# Altium PCB TIA_For_Photodiode.PcbDoc
Units mm, origin at the board's own origin, x right, y up, seen from the top; angles counter-clockwise.
Board outline 40 x 22 mm, 4 copper layers (Top Layer, GND, Power, Bottom Layer), stack 1.5 mm thick; 60 components, 21 nets, 164 pads, 96 vias.
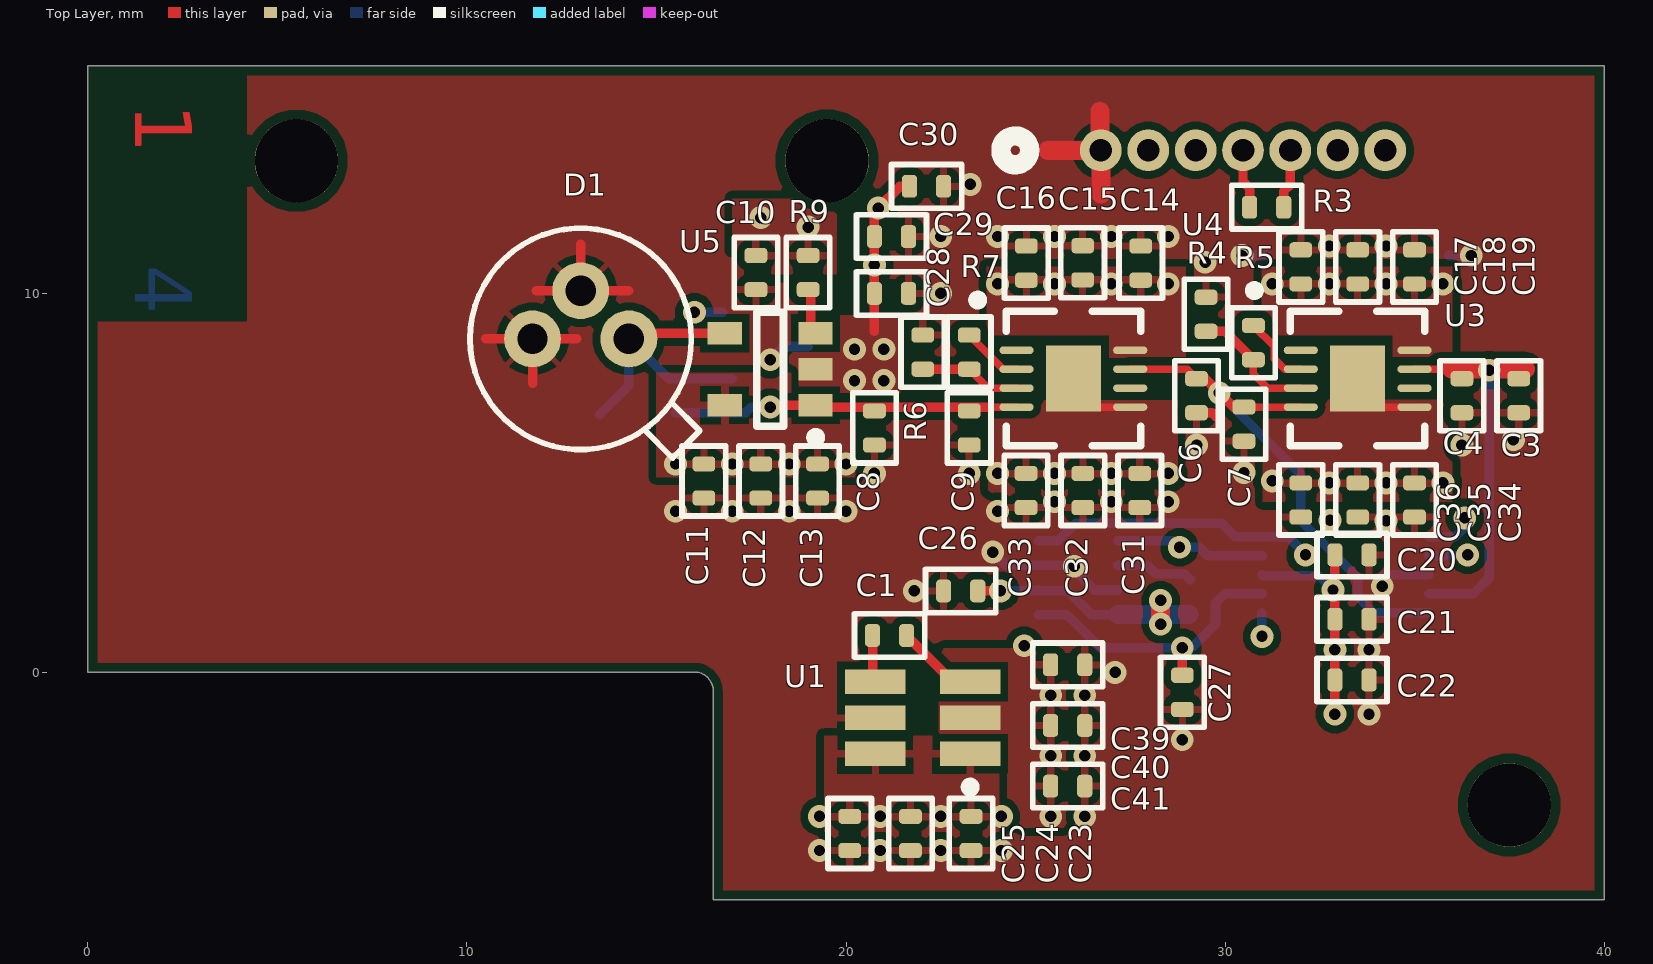
[diagram p0: Top Layer view]
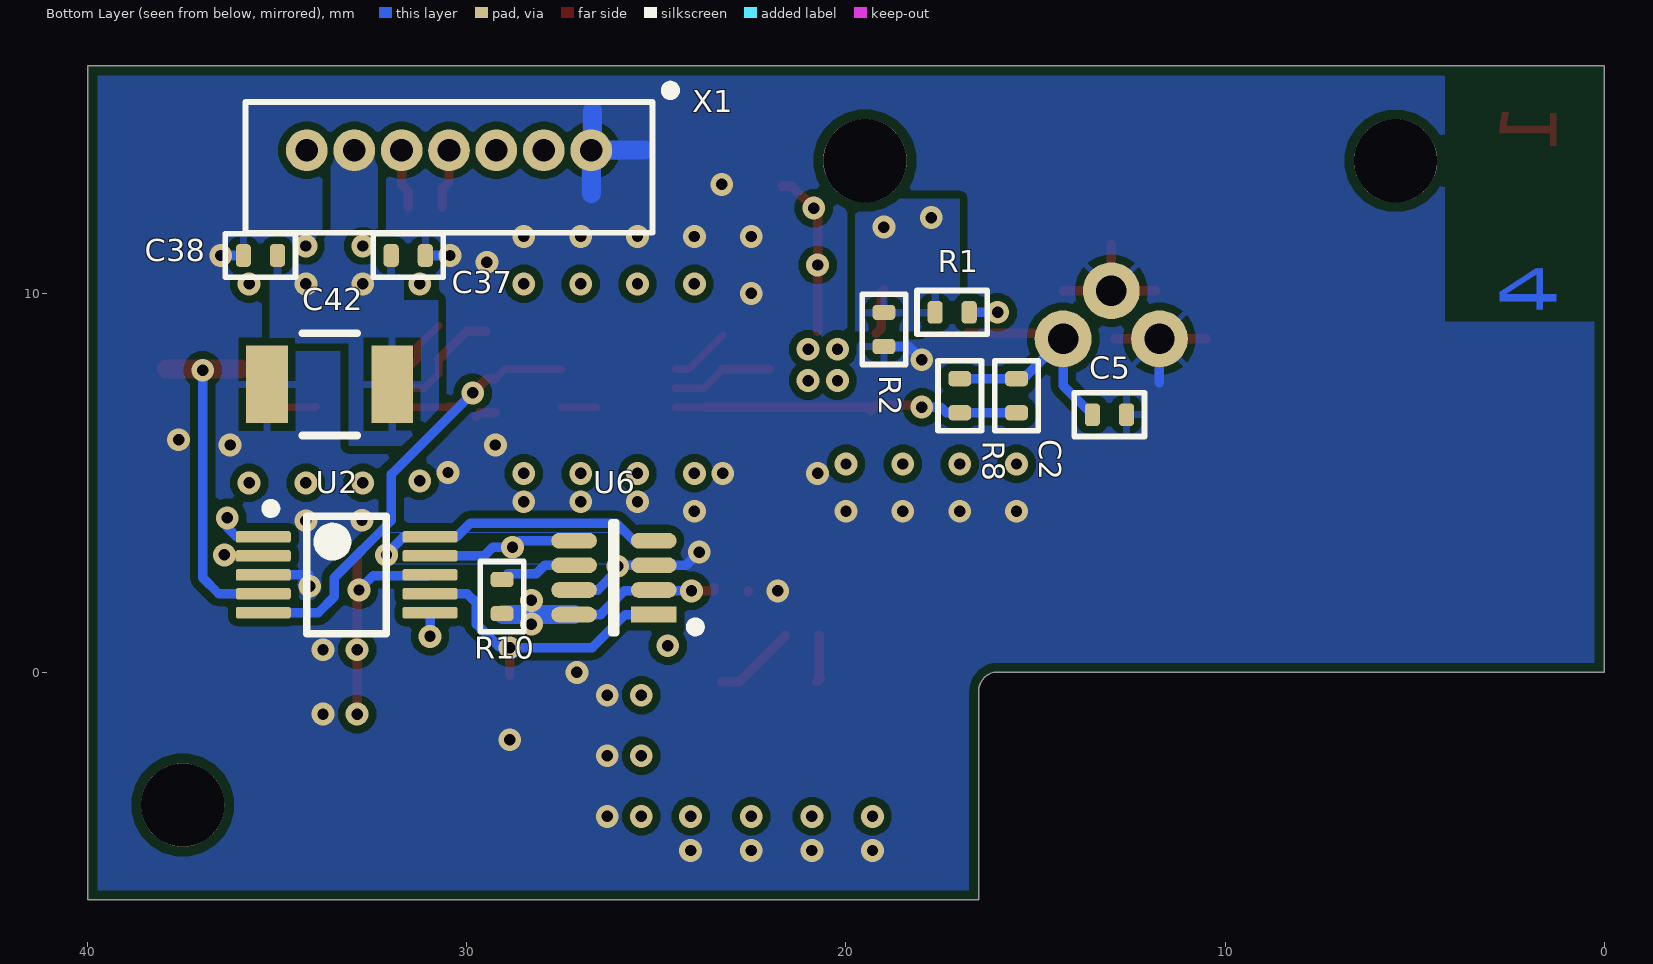
[diagram p1: Bottom Layer view, seen from below]
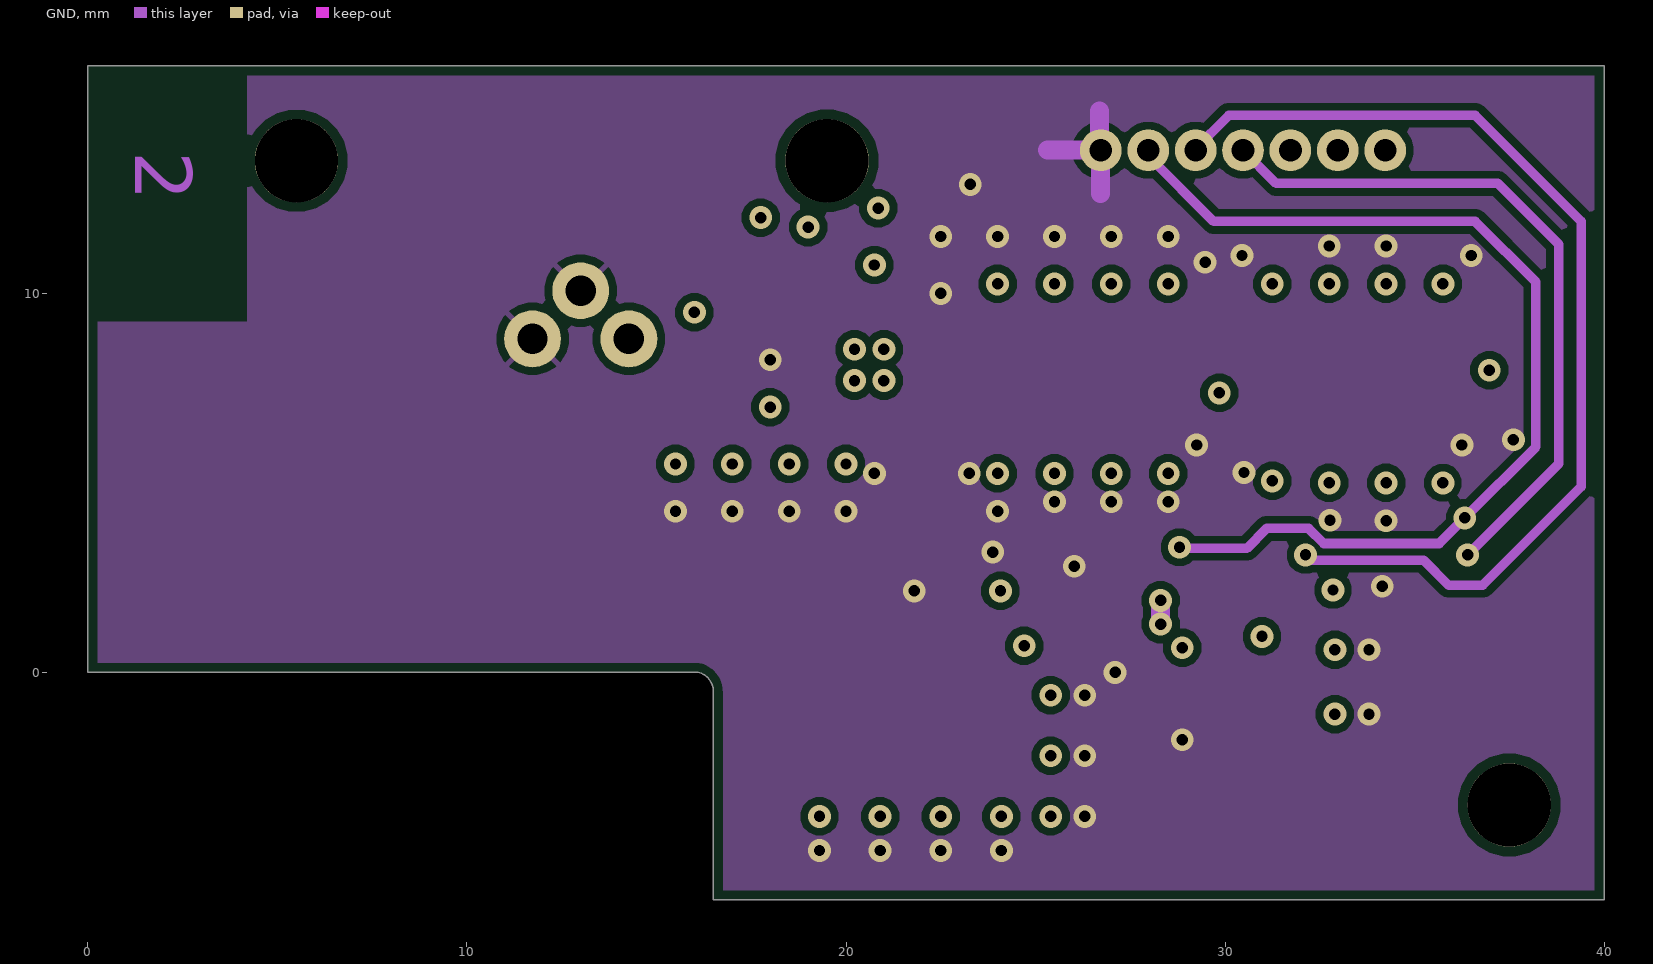
[diagram p2: GND]
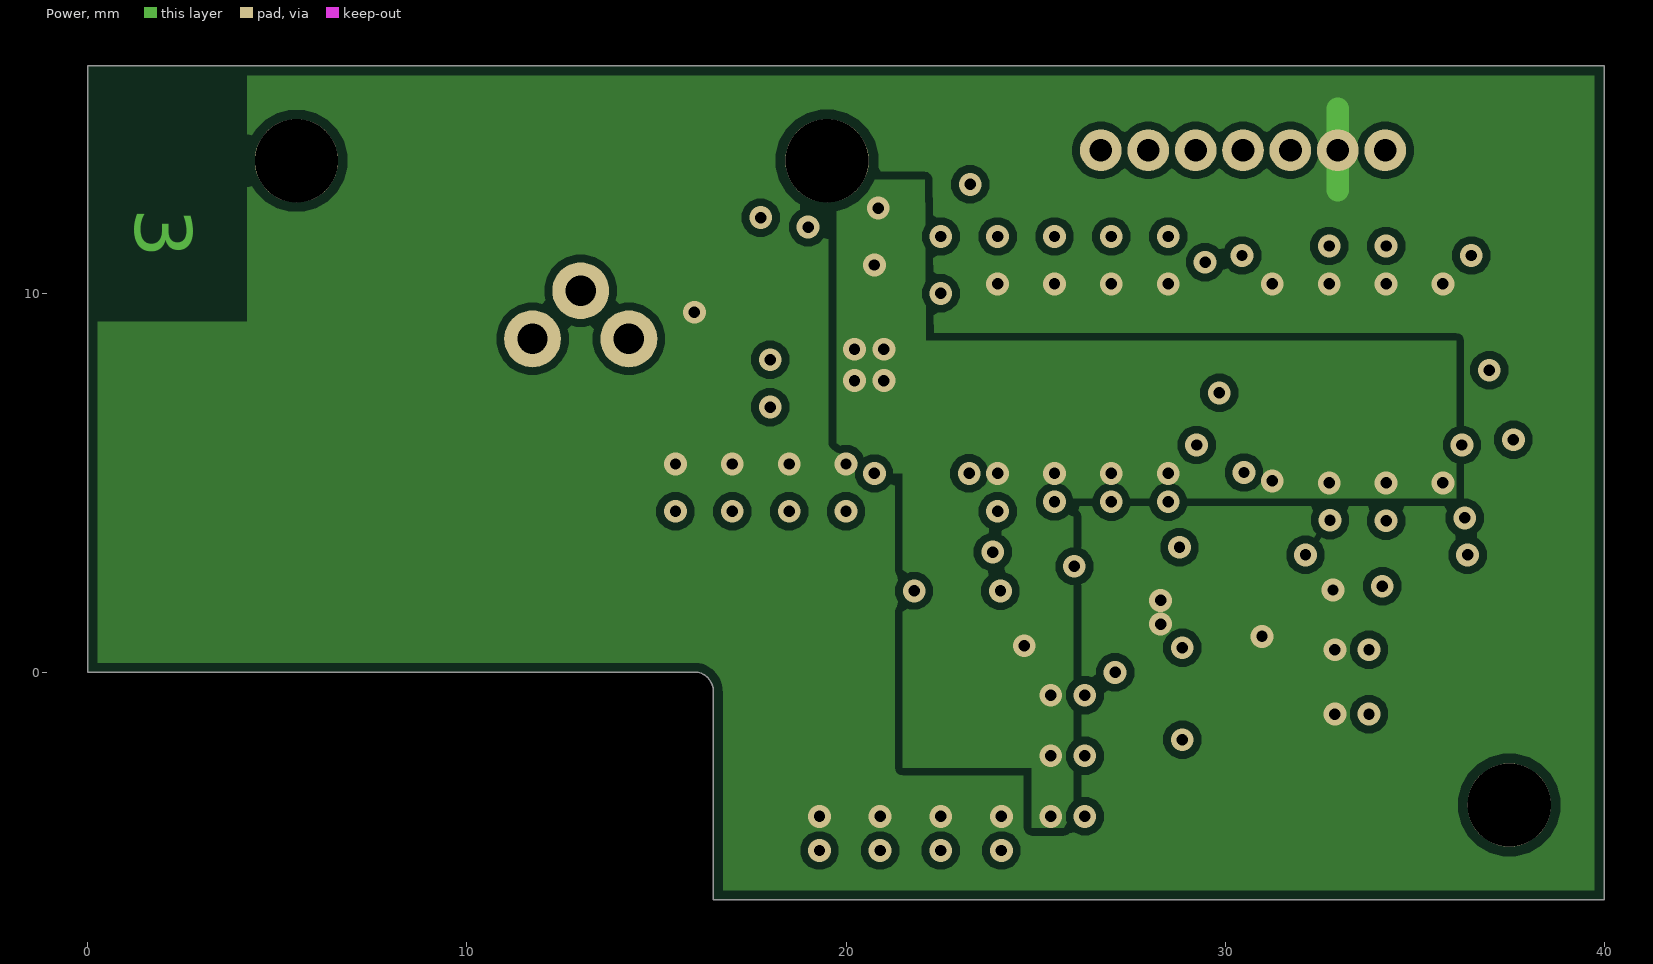
[diagram p3: Power]
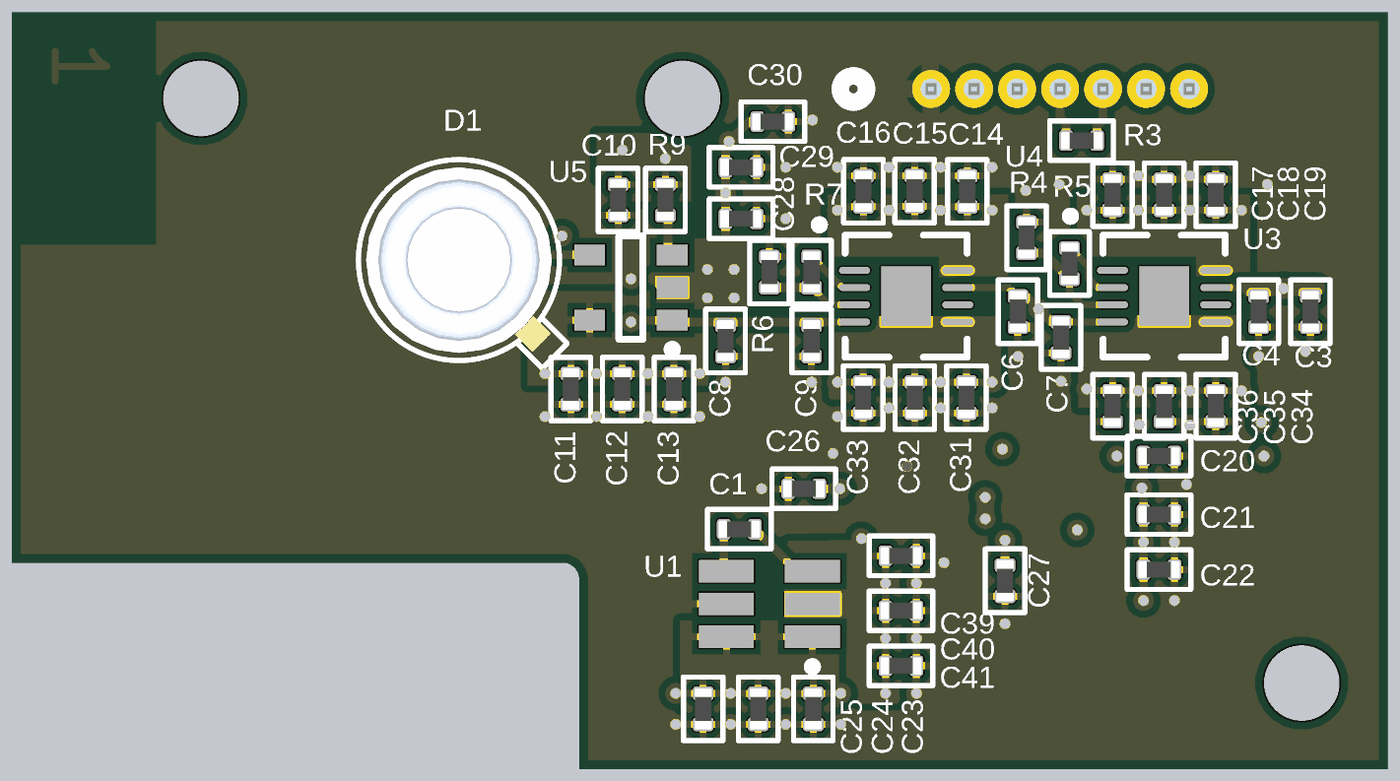
[diagram p4: 3D render of the assembled board from above, using the file's embedded part models]
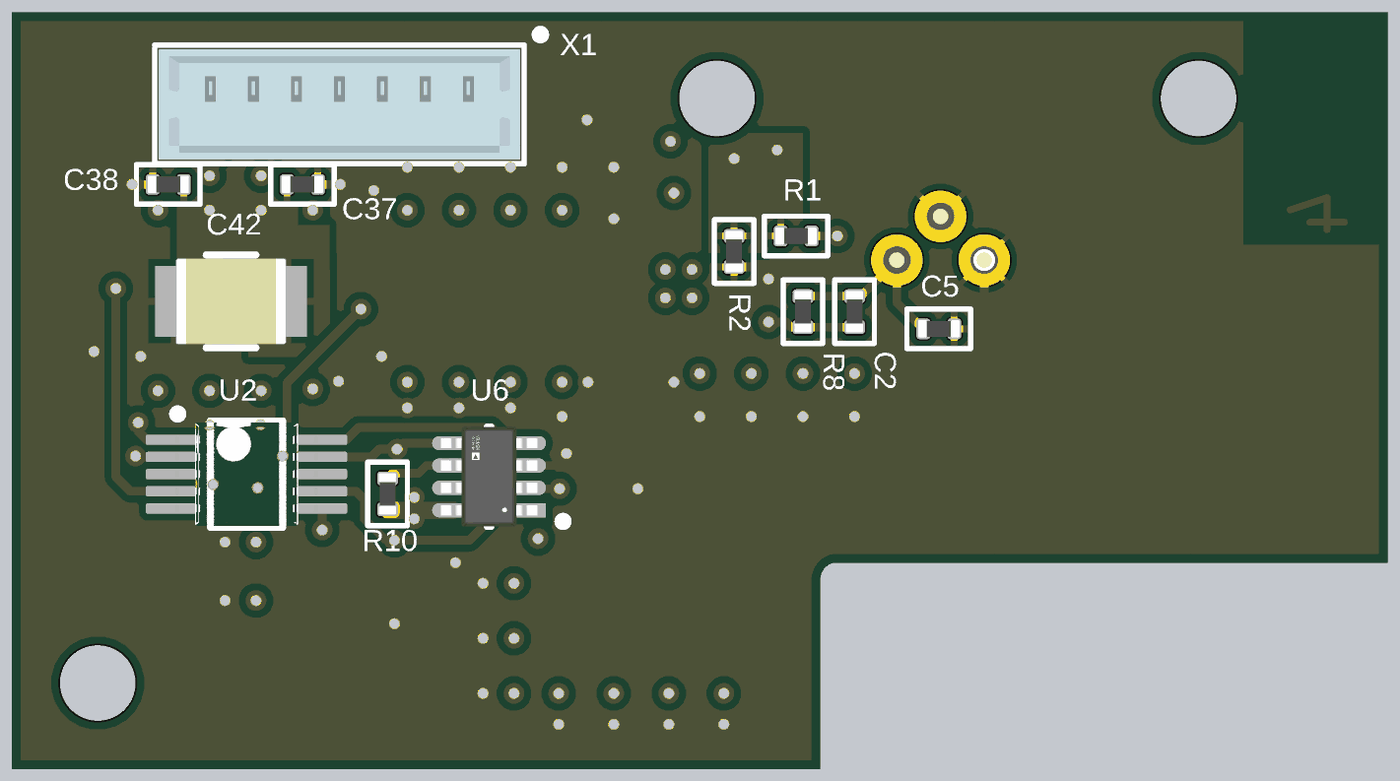
[diagram p5: 3D render of the assembled board from below, using the file's embedded part models]

## Layer stack, top to bottom
Top Solder: solder mask 0.0102, Solder Resist, Dk 3.5
Top Layer: signal copper 0.018
Dielectric 2: prepreg 0.115, FR4 PR, Dk 4.2
GND: signal copper 0.035
Dielectric 1: core 1.164, FR4 Tg150, Dk 4.6
Power: signal copper 0.035
Dielectric 3: prepreg 0.115, FR4 PR, Dk 4.2
Bottom Layer: signal copper 0.018
Bottom Solder: solder mask 0.0102, Solder Resist, Dk 3.5

## Board outline
0,0 16.1,0 cw(c15.987,-0.5) 16.5,-0.5 16.5,-6 40,-6 40,16 0,16

## Design rules (kind name [scope] priority, off if disabled: settings)
AcuteAngle [All] p1: minimum=3.50000000000000E+0001 checktracksonly=FALSE
BoardOutlineClearance "BoardOutlineClearance 1" [All] p1: gap=0.25 ignorepadtopadclearanceinfootprint=FALSE except(0: Arc-SplitContinuation Track-SplitContinuation SMDPad-SplitContinuation THPad-SplitContinuation Via-SplitContinuation Fill-SplitContinuation Poly-SplitContinuation Region-SplitContinuation Text-SplitContinuation) // Milling
BoardOutlineClearance "BoardOutlineClearance 2" [All] p2: gap=0.4 ignorepadtopadclearanceinfootprint=FALSE except(0: Arc-SplitContinuation Track-SplitContinuation SMDPad-SplitContinuation THPad-SplitContinuation Via-SplitContinuation Fill-SplitContinuation Poly-SplitContinuation Region-SplitContinuation Text-SplitContinuation) // V-Cut
Clearance "Clearance 3 Oz" [All] p1 off: gap=0.35 ignorepadtopadclearanceinfootprint=FALSE except(0.25: Arc-Hole Track-Hole SMDPad-Hole THPad-Hole Via-Hole Fill-Hole Poly-Hole Region-Hole Text-Hole)
Clearance "Clearance 2 Oz" [All] p2 off: gap=0.3 ignorepadtopadclearanceinfootprint=FALSE except(0.25: Arc-Hole Track-Hole SMDPad-Hole THPad-Hole Via-Hole Fill-Hole Poly-Hole Region-Hole Text-Hole)
Clearance "Clearance-1 1 Oz" [All] p3 off: gap=0.2 ignorepadtopadclearanceinfootprint=FALSE except(0.25: Arc-Hole Track-Hole SMDPad-Hole THPad-Hole Via-Hole Fill-Hole Poly-Hole Region-Hole Text-Hole) // Standart
Clearance "Clearance-2 1 Oz" [All] p4 off: gap=0.15 ignorepadtopadclearanceinfootprint=FALSE except(0.2: Arc-Fill Arc-Poly Track-Fill Track-Poly SMDPad-Fill SMDPad-Poly THPad-Fill THPad-Poly Via-Fill Via-Poly Fill-Fill Fill-Poly Poly-Poly; 0.25: Arc-Hole Track-Hole SMDPad-Hole THPad-Hole Via-Hole Fill-Hole Poly-Hole Region-Hole Text-Hole) // Advance
Clearance "Clearance-1 1/2 Oz" [All] p5: gap=0.125 ignorepadtopadclearanceinfootprint=TRUE except(0.2: Arc-Fill Arc-Poly Track-Fill Track-Poly SMDPad-SMDPad SMDPad-Fill SMDPad-Poly THPad-Fill THPad-Poly Via-Fill Via-Poly Fill-Fill Fill-Poly Poly-Poly Poly-Region Poly-Text; 0.25: Arc-Hole Track-Hole SMDPad-Hole THPad-Hole Via-Hole Fill-Hole Poly-Hole Region-Hole Text-Hole) // Standart
Clearance "Clearance-2 1/2 Oz" [All] p6 off: gap=0.1 ignorepadtopadclearanceinfootprint=FALSE except(0.15: Arc-Fill Arc-Poly Track-Fill Track-Poly SMDPad-SMDPad SMDPad-Fill SMDPad-Poly THPad-Fill THPad-Poly Via-Fill Via-Poly Fill-Fill Fill-Poly Poly-Poly Poly-Region Poly-Text; 0.25: Arc-Hole Track-Hole SMDPad-Hole THPad-Hole Via-Hole Fill-Hole Poly-Hole Region-Hole Text-Hole) // Advance
DiffPairsRouting "DiffPairsRouting 1 Oz" [All] p1: maxlimit=0.254 minlimit=0.2 mostfreqgap=0.254 toplayer_minwidth=0.2 toplayer_maxwidth=0.381 toplayer_prefwidth=0.381 midlayer1_minwidth=0.2 midlayer1_maxwidth=0.381 midlayer1_prefwidth=0.381 midlayer2_minwidth=0.2 midlayer2_maxwidth=0.381 midlayer2_prefwidth=0.381 bottomlayer_minwidth=0.2 bottomlayer_maxwidth=0.381 bottomlayer_prefwidth=0.381 maxuncoupledlength=12.7
DiffPairsRouting "DiffPairsRouting 1/2 Oz" [All] p2: maxlimit=0.254 minlimit=0.1 mostfreqgap=0.254 toplayer_minwidth=0.1 toplayer_maxwidth=0.381 toplayer_prefwidth=0.381 midlayer1_minwidth=0.1 midlayer1_maxwidth=0.381 midlayer1_prefwidth=0.381 midlayer2_minwidth=0.1 midlayer2_maxwidth=0.381 midlayer2_prefwidth=0.381 bottomlayer_minwidth=0.1 bottomlayer_maxwidth=0.381 bottomlayer_prefwidth=0.381 maxuncoupledlength=12.7
HoleSize "Minimum HoleSize" [IsPad] p1 off: absolutevalues=TRUE maxlimit=5.9 minlimit=0.6 maxpercent=80.000 minpercent=20.000
HoleSize "Minimum HoleSize VIA 1" [IsVia] p2: absolutevalues=TRUE maxlimit=5.9 minlimit=0.3 maxpercent=80.000 minpercent=20.000 // Standart
HoleSize "Minimum HoleSize VIA 2" [IsVia] p3 off: absolutevalues=TRUE maxlimit=5.9 minlimit=0.2 maxpercent=80.000 minpercent=20.000 // Advance
HoleToHoleClearance Hole2HoleClearance [All] p1: gap=0.25 allowstackedmicrovias=FALSE
MinimumAnnularRing "Minimum AR VIA Standart" [IsVia] p1: minimumring=0.15
MinimumAnnularRing "Minimum AR PAD Standart" [IsPAD] p2: minimumring=0.2
MinimumAnnularRing "Minimum AR VIA Advance" [IsVia] p3: minimumring=0.1
MinimumAnnularRing "Minimum AR PAD Advance" [IsPAD] p4: minimumring=0.15
MinimumSolderMaskSliver "SolderMask Bridge Standart" [All] p1: minsoldermaskwidth=0.15 // All Masks
MinimumSolderMaskSliver "SolderMask Bridge Advance" [All] p2: minsoldermaskwidth=0.1 // Mask LDI
PlaneClearance "PlaneClearance 3 Oz" [All] p1 off: clearance=0.35
PlaneClearance "PlaneClearance 2 Oz" [All] p2 off: clearance=0.3
PlaneClearance "PlaneClearance 1 Oz" [All] p3 off: clearance=0.2
PlaneClearance "PlaneClearance-1 1/2 Oz" [All] p4: clearance=0.2 // Standart
PlaneClearance "PlaneClearance-2 1/2 Oz" [All] p5 off: clearance=0.15 // Advance
PlaneConnect "TermalConnect 3 Oz" [All] p1 off: planeconnectstyle=Relief reliefexpansion=0.2 reliefentries=4 reliefconductorwidth=0.35 reliefairgap=0.35 // Standart
PlaneConnect "TermalConnect 2 Oz" [All] p2 off: planeconnectstyle=Relief reliefexpansion=0.2 reliefentries=4 reliefconductorwidth=0.3 reliefairgap=0.3 // Standart
PlaneConnect "TermalConnect-1 1 Oz" [All] p3 off: planeconnectstyle=Relief reliefexpansion=0.2 reliefentries=4 reliefconductorwidth=0.2 reliefairgap=0.2 // Standart
PlaneConnect "TermalConnect-2 1 Oz" [All] p4 off: pad.planeconnectstyle=Relief pad.reliefexpansion=0.15 pad.reliefentries=4 pad.reliefconductorwidth=0.2 pad.reliefairgap=0.2 via.planeconnectstyle=Direct via.reliefexpansion=0.15 via.reliefentries=4 via.reliefconductorwidth=0.15 via.reliefairgap=0.15 // Advance
PlaneConnect "TermalConnect-1 1/2 Oz" [All] p5: planeconnectstyle=Relief reliefexpansion=0.2 reliefentries=4 reliefconductorwidth=0.2 reliefairgap=0.2 // Standart
PlaneConnect "TermalConnect-2 1/2 Oz" [All] p6 off: pad.planeconnectstyle=Relief pad.reliefexpansion=0.15 pad.reliefentries=4 pad.reliefconductorwidth=0.15 pad.reliefairgap=0.15 via.planeconnectstyle=Direct via.reliefexpansion=0.15 via.reliefentries=4 via.reliefconductorwidth=0.15 via.reliefairgap=0.15 // Advance
PolygonConnect "PolygonConnect 3 Oz" [All] p1 off: thpad.connectstyle=Relief thpad.reliefconductorwidth=0.35 thpad.reliefentries=4 thpad.polygonreliefangle="90 Angle" thpad.airgapwidth=0.35 smdpad.connectstyle=Relief smdpad.reliefconductorwidth=0.35 smdpad.reliefentries=4 smdpad.polygonreliefangle="90 Angle" smdpad.airgapwidth=0.35 via.connectstyle=Direct via.reliefconductorwidth=0.254 via.reliefentries=4 via.polygonreliefangle="90 Angle" via.airgapwidth=0.254
PolygonConnect "PolygonConnect 2 Oz" [All] p2 off: thpad.connectstyle=Relief thpad.reliefconductorwidth=0.3 thpad.reliefentries=4 thpad.polygonreliefangle="90 Angle" thpad.airgapwidth=0.3 smdpad.connectstyle=Relief smdpad.reliefconductorwidth=0.3 smdpad.reliefentries=4 smdpad.polygonreliefangle="90 Angle" smdpad.airgapwidth=0.3 via.connectstyle=Direct via.reliefconductorwidth=0.254 via.reliefentries=4 via.polygonreliefangle="90 Angle" via.airgapwidth=0.254
PolygonConnect "PolygonConnect-1 1 Oz" [All] p3 off: thpad.connectstyle=Relief thpad.reliefconductorwidth=0.2 thpad.reliefentries=4 thpad.polygonreliefangle="90 Angle" thpad.airgapwidth=0.2 smdpad.connectstyle=Relief smdpad.reliefconductorwidth=0.2 smdpad.reliefentries=4 smdpad.polygonreliefangle="90 Angle" smdpad.airgapwidth=0.2 via.connectstyle=Direct via.reliefconductorwidth=0.254 via.reliefentries=4 via.polygonreliefangle="90 Angle" via.airgapwidth=0.254 // Standart
PolygonConnect "PolygonConnect-2 1 Oz" [All] p4 off: thpad.connectstyle=Relief thpad.reliefconductorwidth=0.15 thpad.reliefentries=4 thpad.polygonreliefangle="90 Angle" thpad.airgapwidth=0.15 smdpad.connectstyle=Relief smdpad.reliefconductorwidth=0.15 smdpad.reliefentries=4 smdpad.polygonreliefangle="90 Angle" smdpad.airgapwidth=0.15 via.connectstyle=Direct via.reliefconductorwidth=0.254 via.reliefentries=4 via.polygonreliefangle="90 Angle" via.airgapwidth=0.254 // Advance
PolygonConnect "PolygonConnect-1 1/2 Oz" [All] p5: thpad.connectstyle=Relief thpad.reliefconductorwidth=0.15 thpad.reliefentries=4 thpad.polygonreliefangle="90 Angle" thpad.airgapwidth=0.2 smdpad.connectstyle=Relief smdpad.reliefconductorwidth=0.2 smdpad.reliefentries=4 smdpad.polygonreliefangle="90 Angle" smdpad.airgapwidth=0.2 via.connectstyle=Direct via.reliefconductorwidth=0.254 via.reliefentries=4 via.polygonreliefangle="90 Angle" via.airgapwidth=0.254 // Standart
PolygonConnect "PolygonConnect-2 1/2 Oz" [All] p6 off: thpad.connectstyle=Relief thpad.reliefconductorwidth=0.125 thpad.reliefentries=4 thpad.polygonreliefangle="90 Angle" thpad.airgapwidth=0.15 smdpad.connectstyle=Relief smdpad.reliefconductorwidth=0.125 smdpad.reliefentries=4 smdpad.polygonreliefangle="90 Angle" smdpad.airgapwidth=0.15 via.connectstyle=Direct via.reliefconductorwidth=0.254 via.reliefentries=4 via.polygonreliefangle="90 Angle" via.airgapwidth=0.254 // Advance
RoutingCorners [All] p1 off: cornerstyle=45-Degree minsetback=2.54 maxsetback=2.54
RoutingVias [All] p1: holewidth=0.3 width=0.6 viastyle="Through Hole" minholewidth=0.2 minwidth=0.4 maxholewidth=5.9 maxwidth=6.4
SilkToSilkClearance Silk2SilkClearance [All] p1 off: silktosilkclearance=0.15
SilkToSolderMaskClearance Silk2SolderMaskClearance [IsPad] p1 off: minsilkscreentomaskgap=0.15 clearancetoexposedcopper=TRUE
SolderMaskExpansion SolderMaskExpansion-1 [All] p1: expansion=0.05 istentingtop=FALSE // Standart
SolderMaskExpansion "SolderMaskExpansion LDI" [All] p2 off: expansion=0.025 istentingtop=FALSE // Advance
UnRoutedNet [All] p1: checkbadconnections=TRUE
Width "Width 3 Oz" [All] p1 off: maxlimit=10 minlimit=0.35 preferedwidth=0.4 checkconnectedcopper=TRUE
Width "Width 2 Oz" [All] p2 off: maxlimit=10 minlimit=0.3 preferedwidth=0.35 minimp=50.000000 maximp=50.000000 favimp=50.000000 checkconnectedcopper=TRUE
Width "Width 1 Oz" [All] p3 off: maxlimit=10 minlimit=0.15 preferedwidth=0.2 checkconnectedcopper=TRUE
Width "Width 1/2 Oz" [All] p4: maxlimit=10 minlimit=0.1 preferedwidth=0.25 checkconnectedcopper=TRUE
20 further rules are at their usual default settings.

## Components (designator, comment, footprint, x,y, rotation, side; value= is the part's Value field where it differs from the comment)
C1 "1u" "SMD 0402" 20.7,0.975 r0 top
C2 "1p" "SMD 0402" 15.5,7.75 r270 bottom
C3 "1n" "SMD 0402" 37.75,6.85 r90 top
C4 "1u" "SMD 0402" 36.25,6.85 r90 top
C5 "1p" "SMD 0402" 12.6,6.8 r0 bottom
C6 "1n" "SMD 0402" 29.25,6.85 r90 top
C7 "1u" "SMD 0402" 30.5,6.1 r90 top
C8 "1n" "SMD 0402" 20.75,6 r90 top
C9 "1u" "SMD 0402" 23.25,6 r90 top
C10 "1p" "SMD 0402" 17.625,10.1 r90 top
C11 "1n" "SMD 0402" 16.25,5.5 r270 top
C12 "100n" "SMD 0402" 17.75,5.5 r270 top
C13 "1u" "SMD 0402" 19.25,5.5 r270 top
C14 "1n" "SMD 0402" 27.776,10.349 r90 top
C15 "100n" "SMD 0402" 26.244,10.356 r90 top
C16 "1u" "SMD 0402" 24.758,10.349 r90 top
C17 "1n" "SMD 0402" 32,10.25 r90 top
C18 "100n" "SMD 0402" 33.5,10.25 r90 top
C19 "1u" "SMD 0402" 35,10.25 r90 top
C20 "1n" "SMD 0402" 32.9,3.1 r0 top
C21 "1u" "SMD 0402" 32.9,1.4 r0 top
C22 "4.7u" "SMD 0402" 32.9,-0.2 r0 top
C23 "100n" "SMD 0402" 23.3,-3.8 r270 top
C24 "1u" "SMD 0402" 21.7,-3.8 r270 top
C25 "10u" "SMD 0402" 20.1,-3.8 r270 top
C26 "1n" "SMD 0402" 22.575,2.15 r0 top
C27 "1n" "SMD 0402" 28.875,-0.975 r90 top
C28 "1n" "SMD 0402" 20.75,10 r0 top
C29 "100n" "SMD 0402" 20.75,11.5 r0 top
C30 "1u" "SMD 0402" 21.675,12.825 r0 top
C31 "1n" "SMD 0402" 27.75,5.25 r270 top
C32 "100n" "SMD 0402" 26.25,5.25 r270 top
C33 "1u" "SMD 0402" 24.75,5.25 r270 top
C34 "1n" "SMD 0402" 35,5 r270 top
C35 "100n" "SMD 0402" 33.5,5 r270 top
C36 "1u" "SMD 0402" 32,5 r270 top
C37 "1u" "SMD 0402" 32,11 r180 bottom
C38 "10u" "SMD 0402" 35,11 r0 bottom
C39 "100n" "SMD 0402" 25.4,0.2 r0 top
C40 "1u" "SMD 0402" 25.4,-1.4 r0 top
C41 "10u" "SMD 0402" 25.4,-3 r0 top
C42 "GRM32ER60J107ME20L" FP-GRM32-0_3-MFG 33.625,7.6 r0 bottom value=100uF
D1 "S5973" TO-18 13,8.8 r180 top locked
R1 "10k" "SMD 0402" 17.65,9.5 r180 bottom
R2 "10k" "SMD 0402" 19,8.6 r90 bottom
R3 "10k" "SMD 0402" 30.65,12.275 r0 top
R4 "10k" "SMD 0402" 29.5,9.9 r270 top
R5 "10k" "SMD 0402" 30.75,8.25 r90 top
R6 "10k" "SMD 0402" 22.025,8.9 r270 top
R7 "10k" "SMD 0402" 23.25,8 r90 top
R8 "1M" "SMD 0402" 17,7.75 r270 bottom
R9 "1M" "SMD 0402" 19,11 r270 top
R10 "10k" "SMD 0402" 29.075,1.55 r90 bottom
U1 "LTC1983ES6-5" LT-S6-6-TSOT-23_M 22.025,-1.2 r180 top
U2 "ADS1015IDGST" FP-DGS0010A-MFG 33.175,2.575 r180 bottom
U3 "AD8045ACPZ-REEL7" ADI-CP-8-2_N 33.5,7.75 r0 top
U4 "AD8045ACPZ-REEL7" ADI-CP-8-2_N 26,7.75 r0 top
U5 "AD8065ARTZ-REEL7" ADI-RJ-5_L 18,8 r180 top
U6 "AD5245BRJZ10-R2" FP-RJ-8-IPC_C 26.125,2.5 r0 bottom
X1 "PicoBlade 7 pins" "PicoBlade 7 pins" 30.475,13.325 r180 bottom

## Footprints (in the part's own frame and the unit in brackets; to place one, negate y for a bottom-side part, rotate by r counter-clockwise, add the part's x,y. Pads: shape width x height; smd on the part's side, far side on the other; paste and mask are expansions set on the pad)
ADI-CP-8-2_N [mm] "QFN, 8-Leads, Body 3x3mm, Pitch 0.5mm, Thermal Pad 1.45X1.74mm, IPC Medium Density"
  oval 0.9x0.2 smd: 1(-1.5,0.75) 2(-1.5,0.25) 3(-1.5,-0.25) 4(-1.5,-0.75) 5(1.5,-0.75) 6(1.5,-0.25) 7(1.5,0.25) 8(1.5,0.75)
  rect 1.45x1.74 smd: 9(0,0)
  silkscreen extent -2.85,-1.78 1.78,2.45, body extent -1.63,-1.63 1.63,1.63, height 0.9
ADI-RJ-5_L [mm] "SOT-23, 5-Leads, Body 2.9x1.6mm, Pitch 0.95mm, IPC High Density"
  rect 0.9x0.6 smd: 1(-1.2,0.95) 2(-1.2,0) 3(-1.2,-0.95) 4(1.2,-0.95) 5(1.2,0.95)
  silkscreen extent -1.33,-1.5 0.35,1.92, body extent -0.85,-1.5 0.85,1.5, height 1.45
FP-DGS0010A-MFG [mm]
  rrect33% 1.45x0.3 smd paste+0 mask+0: 1(-2.2,1) 2(-2.2,0.5) 3(-2.2,0) 4(-2.2,-0.5) 5(-2.2,-1) 6(2.2,-1) 7(2.2,-0.5) 8(2.2,0) 9(2.2,0.5) 10(2.2,1)
  silkscreen extent -2.12,-1.55 1.05,1.87, body extent -2.45,-1.5 2.45,1.5, height 1.1
FP-GRM32-0_3-MFG [mm]
  rect 1.1x2.05 smd paste+0 mask+0: 1(-1.65,0) 2(1.65,0)
  silkscreen extent -0.72,-1.35 0.72,1.35, body extent -1.6,-1.25 1.6,1.25, height 2.7
FP-RJ-8-IPC_C [mm]
  rect 1.205x0.415 smd paste+0 mask+0: 1(-1.05,0.975)
  rrect100% 1.205x0.415 smd paste+0 mask+0: 2(-1.05,0.325) 3(-1.05,-0.325) 4(-1.05,-0.975) 5(1.05,-0.975) 6(1.05,-0.325) 7(1.05,0.325) 8(1.05,0.975)
  silkscreen extent -2.27,-1.45 0.05,1.45, body extent -1.4,-1.45 1.4,1.45, height 1.45
LT-S6-6-TSOT-23_M [mm] "SOT23, 6-Leads, Body 2.9x1.75mm, Pitch 0.95mm, IPC Low Density"
  rect 1.6x0.65 smd: 1(-1.25,0.95) 2(-1.25,0) 3(-1.25,-0.95) 4(1.25,-0.95) 5(1.25,0) 6(1.25,0.95)
  silkscreen extent -1.38,1.7 -1.13,1.95, body extent -0.87,-1.45 0.87,1.45, height 1
"PicoBlade 7 pins" [mm]
  round 1.1 hole 0.6 paste-0.533 mask+0: 1(3.75,0.45) 2(2.5,0.45) 3(1.25,0.45) 4(0,0.45) 5(-1.25,0.45) 6(-2.5,0.45) 7(-3.75,0.45)
  silkscreen extent -5.37,-1.73 5.97,2.16, body extent -5.25,-1.6 5.25,1.6, height 4.2
"SMD 0402" [mm]
  rrect50% 0.4x0.6 smd mask+0.05: 1(0,0) 2(0.9,0)
  silkscreen extent -0.48,-0.57 1.38,0.58, body extent -0.15,-0.25 1.05,0.25, height 0.4
TO-18 [mm]
  round 1.5 hole 0.8: 1(-1.27,0) 2(0,-1.27) 3(1.27,0)
  silkscreen extent -3.14,-2.92 2.92,3.14, body extent -2.69,-2.7 2.69,2.7, height 3.8

## Part data
C1: library part "Capacitor 0402 0,047u X7R 10% 25v", Tolerance=10%, Voltage=25v, Link=https://www.chipdip.ru/product/grm155r71e473k, Part Name="Capacitor 0402 0,047u X7R 10% 25v", Type=X7R
C2 C3 C4 C5 C6 C7 C8 C9 C10 C11 C12 C13 C14 C15 C16 C17 C18 C19 C20 C21 C22 C23 C24 C25 C26 C27 C28 C29 C30 C31 C32 C33 C34 C35 C36 C37 C38 C39 C40 C41: library part "Capacitor 0402 4.7u X5R 20% 6,3v", Tolerance=20%, Voltage=6,3v, Link=https://www.chipdip.ru/product0/9000349068, Part Name="Capacitor 0402 4.7u X5R 20% 6,3v", Type=X5R
C42: library part CMP-2000-05259-2, "CAP CER 100UF 6.3V X5R 1210", 3DS Part Number=220-00002, Capacitance=100uF, Manufacturer=Murata, Package=GRM32-0.3, Temperature="-55°C to +85°C", Temperature Characteristic=X5R, Temperature Coefficient=15%, Temperature Range High=+85°C, Temperature Range Low=-55°C, Tolerance=20%, Voltage=6.3V, Automotive=No, Category=Cap, ComponentLink2Description=Datasheet, ComponentLink2URL=https://search.murata.co.jp/Ceramy/image/img/A01X/G101/ENG/GRM32ER60J107ME20-01.pdf, Device Class L1="Passive Components", Device Class L2=Capacitors, Device Class L3="Ceramic Capacitors", Digikey Description="CAP CER 100UF 6.3V X5R 1210", Height=2.7mm, Ipc Land Pattern Name=CAPC320250X250, Lead Free=Yes, Manufacturer Part Number=GRM32ER60J107ME20L, Material=Ceramic, Octopart=https://octopart.com/grm32er60j107me20l-murata-197007, RoHS=TRUE, Voltage Rating=6.3V
D1: "Hamamatsu, S5973 IR + Visible Light Si PIN Photodiode, Through Hole TO-18"
R1 R2 R3 R4 R5 R6 R7 R8 R9 R10: library part "Resistor 0402 11k 1%", Power Rating=0,062W, Temperature=-55...+155°C, Temperature Coefficient=100ppm/°C, Tolerance=1%, Link=https://www.chipdip.ru/product/0.062w-0402-11-kom-1, Part Name="Resistor 0402 11k 1%"
U1: library part CMP-0475-00349-1, "100 mA Regulated Charge-Pump Inverter, 5 to 5.5 V Vin, -5 V Vout, 6-pin SOT23 (S6-6), -40 to 85 degC", Frequency(kHz)=900, Manufacturer="Linear Technology", Code_JEDEC=MO-193, ComponentLink1Description="Manufacturer URL", ComponentLink1URL=http://www.linear.com/, ComponentLink2Description=Datasheet, ComponentLink2URL=http://cds.linear.com/docs/en/datasheet/1983fa.pdf, ComponentLink3Description="Package Specification", ComponentLink3URL=http://cds.linear.com/docs/en/packaging/SOT_6_05-08-1636.pdf, DatasheetVersion="Rev. A", Ishutdown(uA)=0.1, Isupply(mA)=0.025, Max Iout(mA)=100, Mounting Technology="Surface Mount", PackageDescription="6-Pin Plastic TSOT-23, Body 2.9 x 1.63 mm, Pitch 0.95 mm", PackageReference=S6-6, PackageVersion=Jun-10, PartNumber=LTC1983ES6-5, RoHS=FALSE, Vin Max(V)=5.5, Vin Min(V)=5, Voutput="-5 V"
U2: library part CMP-0003-00377-3, "IC ADC 12BIT SIGMA-DELTA 10VSSOP", Case/Package=VSSOP, Max Operating Temperature=125°C, Max Power Dissipation=900uW, Max Supply Voltage=5.5V, Min Operating Temperature=-40°C, Min Supply Voltage=2V, Nominal Supply Current=150uA, Operating Supply Voltage=3.3V, Package Quantity=250, Contact Plating=Gold, Conversion Rate=3300S/s, Height=1.02mm, Integral Nonlinearity (INL)=0.5LSB, Interface=I2C, Lead Free="Lead Free", Length=3mm, Max Supply Voltage (DC)=5.5V, Min Supply Voltage (DC)=2V, Number of A/D Converters=1, Number of Bits=12, Number of Channels=4, Number of Converters=1, Number of Elements=1, Number of Inputs=4, Number of Pins=10, Packaging="Tape and Reel", Polarity=Bipolar, Power Dissipation=900uW, Radiation Hardening=No, REACH SVHC="No SVHC", Resolution=12b, Sampling Rate=3.3KS/s, Supply Type=Single, Termination=SMD/SMT, Width=3mm
U3 U4: library part CMP-0384-00082-1, "Single Channel Ultra Low Distortion  Operational Amplifier, 1 GHz BW, 1.35 KV/us SR, Industrial, 8-pin QFN (CP-8-2), Reel", Amplifiers Per Package=1, Generic Part Number=AD8045, Input Bias Current=2uA, Input Offset Voltage=200uV, Manufacturer="Analog Devices", ComponentLink1Description="Manufacturer URL", ComponentLink1URL=http://www.analog.com/en/index.html, ComponentLink2Description=Datasheet, ComponentLink2URL=http://www.analog.com/static/imported-files/data_sheets/AD8045.pdf, ComponentLink3Description="Package Specification", ComponentLink3URL=http://www.analog.com/static/imported-files/packages/56953322593982CP_8_2.pdf, DatasheetVersion="Rev. A", Iq/Amp=19mA, Mounting Technology="Surface Mount", PackageDescription="8-Pin Lead Frame Chip Scale Package, Body 3 x 3 mm, Pitch 0.5 mm", PackageReference=CP-8-2, PackageVersion=061507-B, PartNumber=AD8045ACPZ-REEL7, Slew Rate=1.35KV/us, Small Signal Bandwidth=1GHz, V Span Max=12V, V Span Min=3.3V
U5: library part CMP-0384-01535-3, "Single Channel Low Power Operational Amplifier, 145 MHz BW, 180 V/us SR, Industrial, 5-pin SOT23 (RJ-5), Reel", Amplifiers Per Package=1, Generic Part Number=AD8065, Input Bias Current=2pA, Input Offset Voltage=400uV, Manufacturer="Analog Devices", Automotive Qualified=Yes, Code_JEDEC=MO-178-AA, ComponentLink1Description="Manufacturer URL", ComponentLink1URL=http://www.analog.com/en/index.html, ComponentLink2Description=Datasheet, ComponentLink2URL=http://www.analog.com/static/imported-files/data_sheets/AD8065_8066.pdf, ComponentLink3Description="Package Specification", ComponentLink3URL=http://www.analog.com/static/imported-files/packages/PKG_PDF/SOT-23(RJ)/RJ_5.pdf, ComponentLink4Description="Reference Circuit", ComponentLink4URL=http://www.analog.com/en/all-operational-amplifiers-op-amps/operational-amplifiers-op-amps/ad8065/products/product.html#product-recommendations, DatasheetVersion="Rev. J", Iq/Amp=7.4mA, Mounting Technology="Surface Mount", PackageDescription="5-Pin Small Outline Transistor Package, Body 2.9 x 1.6 mm, Pitch 0.95 mm", PackageReference=RJ-5, PackageVersion=121608-A, PartNumber=AD8065ARTZ-REEL7, RevisionNote="Reference Circuit URL fixed", Slew Rate=180V/us, Small Signal Bandwidth=145MHz, V Span Max=24V, V Span Min=5V
U6: library part CMP-09083-000005-1, "IC DGT POT 10KOHM 256TAP SOT23-8", Manufacturer="Analog Devices", Max Junction Temp=+150°C, Max Supply Voltage=5.5V, Min Supply Voltage=2.7V, Nominal Resistance=10kΩ, Nominal Supply Current=3uA, Package=RJ-8, Temperature="-40°C to +125°C", Temperature Coefficient=45ppm/°C, Temperature Range High=+125°C, Temperature Range Low=-40°C, Tolerance=30%, Automotive=No, Category=IC, ComponentLink2Description=Datasheet, ComponentLink2URL=https://www.analog.com/media/en/technical-documentation/data-sheets/AD5245.pdf, Device Class L1="Integrated Circuits (ICs)", Device Class L2="Data Converter ICs", Device Class L3="Digital Potentiometers", Digikey Description="IC DGT POT 10KOHM 256TAP SOT23-8", Footprint Url=https://www.analog.com/media/en/package-pcb-resources/package/pkg_pdf/sot-23rj/RJ_8.pdf, Height=1.45mm, Interface=I2C, Ipc Land Pattern Name=SOT65P280X120-8, Lead Free=Yes, Manufacturer Part Number=AD5245BRJZ10-R2, Mouser Description="Digital Potentiometer ICs IC 256-pos I2C", Number Of Circuits=1, Number Of Taps=256, Octopart=https://octopart.com/ad5245brjz10-r2-analog+devices-446714, RoHS=TRUE, Standoff Height=0.05mm

## Free pads (board coordinates)
  round 2.2 hole 2.2 unplated mask+0.05: 1(5.5,13.5) 2(19.5,13.5) 3(37.5,-3.5)

## Via types
v1: diameter 0.6, hole 0.3, Top Layer to Bottom Layer, tented both sides, 96 vias

## Nets (pads, with @x,y where several pads share a name; then routed paths per layer and width w, separated by ;. In a path a pad name is that pad's centre, name@x,y a point inside that pad or via, vN(x,y) a via of type N, cw(c..) or ccw(c..) an arc to the next point about the centre after c; other vN are vias at no path point)
3.3V: R3.2 X1.5 | length 1.6
  Top Layer w0.254: R3.2 31.55,12.7 31.725,12.875 X1.5
5V: C11.1 C12.1 C13.1 C14.1 C15.1 C16.1 C17.1 C18.1 C19.1 C20.1 C21.1 C22.1 C23.1 C24.1 C25.1 C26.2 C37.1 C38.1 C42.1 R1.2 R10.1 U1.1 U1.6 U2.6 U2.8 U3.8 U4.8 U5.5 U6.2 U6.8 X1.6 | length 17.6
  Top Layer w0.25: C26.2@23.475,2.25 C26.2 v1(24.075,2.15) ; v1(32.9,-1.1) C22.1 v1(32.9,0.6) C21.1 C20.1
  Top Layer w0.5: v1(28.3,1.275) v1(28.3,1.9)
  GND w0.5: v1(28.3,1.275) v1(28.3,1.9)
  Power w0.6: 32.975,12.725 X1.6 32.975,14.875
  Bottom Layer w0.25: v1(16,9.5) R1.2 ; v1(24.075,2.15) 25.049,2.15 U6.2 ; U6.2@25.099,2.15 25.85,2.15 26.475,1.525 U6.8 ; v1(30.975,0.95) U2.6 ; U2.8 31,2.55 32.476,2.55 v1(32.85,2.176)
  Bottom Layer w0.5: U6.8 v1@28.3,1.525 ; v1(28.3,1.275) v1@28.3,1.525 ; v1(28.3,1.9) v1@28.3,1.525 ; R10.1@29.05,1.525 v1@28.3,1.525
  other v1: 19.3,-3.8 20.9,-3.8 22.5,-3.8 24.1,-3.8 15.5,5.5 17,5.5 18.5,5.5 20,5.5 24,10.25 25.5,10.25 27,10.25 28.5,10.25 31.25,10.25 32.75,10.25 34.25,10.25 35.75,10.25
-5V: C28.1 C29.1 C30.1 C31.1 C32.1 C33.1 C34.1 C35.1 C36.1 C39.1 C40.1 C41.1 U1.2 U3.5 U3.9 U4.5 U4.9 U5.2 | length 6.3
  Top Layer w0.2: U4.9@26.575,7 U4.5 ; U3.9@33.998,7.01 34.008,7 U3.5
  Top Layer w0.254: 20.75,9 C28.1 v1(20.75,10.75) C29.1 20.75,12.15 v1(20.85,12.25) 21.425,12.825 C30.1
  other v1: 25.4,-3.8 25.4,-2.2 25.4,-0.6 24.7,0.7 32.75,5 34.25,5 35.75,5 31.25,5.052 24,5.25 25.5,5.25 27,5.25 28.5,5.25 20.225,7.7 21,7.7 20.225,8.525 21,8.525
ALERT/RDY: R3.1 U2.2 X1.4 | length 21.2
  Top Layer w0.25: X1.4 30.475,12.95 30.65,12.775 R3.1
  GND w0.25: X1.4 31.35,12.9 37.2,12.9 38.8,11.3 38.8,5.5 v1(36.4,3.1)
  Bottom Layer w0.25: U2.2 36.375,3.075 v1(36.4,3.1)
AmpOut_1: C6.2 C7.2 U2.5 U3.4 U4.7 | length 13.9
  Top Layer w0.2: U4.7 29,8 C6.2 ; C7.2 U3.4
  Top Layer w0.25: C6.2 29.475,7.75 30.225,7 C7.2
  Bottom Layer w0.25: v1(29.85,7.375) 32,5.225 32,4.003 33.5,2.503 33.5,2 33.925,1.575 U2.5
GND: C3.1 C4.1 C5.1 C6.1 C7.1 C8.1 C9.1 C10.1 C11.2 C12.2 C13.2 C14.2 C15.2 C16.2 C17.2 C18.2 C19.2 C20.2 C21.2 C22.2 C23.2 C24.2 C25.2 C26.1 C27.1 C28.2 C29.2 C30.2 C31.2 C32.2 C33.2 C34.2 C35.2 C36.2 C37.2 C38.2 C39.2 C40.2 C41.2 C42.2 D1.2 D1.3 R2.1 R4.1 R6.1 U1.5 U2.3 U6.3 U6.7 X1.1 | length 26.9
  Top Layer w0.254: 10.5,8.8 D1.3 ; 11.73,7.63 D1.3 ; 11.83,10.07 D1.2 ; 12.9,8.8 D1.3 ; 13,11.3 D1.2 ; 14.27,10.07 D1.2 ; C26.1@22.575,2.125 C26.1 ; C6.1 29.656,6.85 29.756,6.75
  Top Layer w0.5: 25.325,13.775 X1.1 ; X1.1@26.7,13.8 26.7,14.8 ; 26.725,12.625 X1.1@26.725,13.625
  GND w0.254: X1.1@26.7,13.8 26.712,13.788 X1.1
  GND w0.5: 25.313,13.788 X1.1@26.712,13.788 ; X1.1@26.688,13.813 26.688,14.813 ; 26.713,12.638 X1.1@26.713,13.638
  Bottom Layer w0.254: 11.73,7.645 D1.3 ; v1(18,8.25) 18.35,8.6 R2.1 ; v1(23.875,3.175) 24.225,2.825 U6.3 26,2.825 v1(26.025,2.8) 26.025,2.7 26.55,2.175 U6.7 ; v1(30.45,11) C37.2 ; v1(34.15,2.275) 34.175,2.3 34.175,2.575 U2.3 ; C38.2 v1(36.5,11)
  Bottom Layer w0.5: 25.313,13.788 X1.1@26.712,13.788 ; X1.1@26.688,13.813 26.688,14.813 ; 26.713,12.638 X1.1@26.713,13.638
  other v1: 19.3,-4.7 20.9,-4.7 22.5,-4.7 24.1,-4.7 26.3,-3.8 26.3,-2.2 28.875,-1.775 33.8,-1.1 26.3,-0.6 27.1,0 33.8,0.6 21.8,2.15 32.769,4.017 34.25,4 15.5,4.25 17,4.25 18.5,4.25 20,4.25 24,4.25 25.5,4.5 27,4.5 28.5,4.5 20.75,5.25 23.25,5.25 30.5,5.275 29.25,6 36.25,6 37.609,6.141 22.5,10 29.475,10.825 32.75,11.25 34.25,11.25 22.5,11.5 24,11.5 25.5,11.5 27,11.5 28.5,11.5 23.275,12.875
NetC1_1: C1.1 U1.4 | length 1.3
  Top Layer w0.25: C1.1 20.7,-0.125 20.675,-0.15 U1.4
NetC1_2: C1.2 U1.3 | length 2.2
  Top Layer w0.25: C1.2 22.825,-0.25 U1.3
NetC2_1: C2.1 C5.2 D1.1 R8.1 U5.4 | length 8.1
  Top Layer w0.25: D1.1 14.42,8.95 U5.4
  Bottom Layer w0.25: C5.2 14.27,7.57 D1.1 15.32,7.75 C2.1 R8.1
NetC2_2: C2.2 C8.2 C9.2 R8.2 U4.4 U5.1 | length 9.2
  Top Layer w0.2: 23.725,7 U4.4
  Top Layer w0.25: v1(18,7) 18.05,7.05 U5.1 U5.1@19.25,7 ; U5.1@19.35,6.9 U5.1@19.25,7 ; 23.725,7 U5.1@19.25,7
  Bottom Layer w0.25: C2.2 R8.2 17.35,6.85 17.5,7 v1(18,7)
NetC3_2: C3.2 C4.2 U2.4 U3.7 | length 10.2
  Top Layer w0.2: U3.7 35.975,8
  Top Layer w0.5: 35.975,8 37.925,8
  Bottom Layer w0.25: U2.4 36.55,2.075 36.975,2.5 v1(36.975,7.975)
NetR4_2: R4.2 R5.1 U3.3 | length 3.3
  Top Layer w0.2: R5.1 30.75,7.875 31.125,7.5 U3.3
  Top Layer w0.25: R4.2 30,9 R5.1
NetR5_2: R5.2 U3.2 | length 1.9
  Top Layer w0.2: R5.2 31.3,8.6 31.3,8.275 31.575,8 U3.2
NetR6_2: R6.2 R7.1 U4.3 | length 2.7
  Top Layer w0.2: R7.1 23.75,7.5 U4.3
  Top Layer w0.25: R6.2 R7.1
NetR7_2: R7.2 U4.2 | length 1.6
  Top Layer w0.2: R7.2 24.15,8 U4.2
NetR9_2: R9.2 U5.3 | length 1.2
  Top Layer w0.25: R9.2 19.075,10.025 19.075,9.075 U5.3
NetR10_2: R10.2 U6.6 | length 2.1
  Bottom Layer w0.254: U6.6 27.95,2.825 28.175,2.6 28.925,2.6 R10.2
SCL: U2.10 U6.4 X1.3 | length 35.2
  GND w0.254: X1.3@29.2,13.8 30.1,14.7 36.6,14.7 39.4,11.9 39.4,4.9 36.8,2.3 35.9,2.3 35.236,2.964 34.597,2.964 34.043,2.964 32.125,2.964 v1(32.125,3.1)
  Bottom Layer w0.254: U6.4 25.6,3.475 26.059,3.934 29.916,3.934 30.275,3.575 U2.10 31.677,3.575 31.952,3.3 31.952,3.1 v1(32.125,3.1)
SDA: U2.1 U2.9 U6.5 X1.2 | length 32.2
  GND w0.254: X1.2 27.975,13.625 29.7,11.9 36.6,11.9 38.2,10.3 38.2,5.951 v1(36.325,4.076) 35.649,3.4 32.606,3.4 32.206,3.8 31.1,3.8 30.575,3.275 28.825,3.275 v1(28.8,3.3)
  Bottom Layer w0.254: U6.5 28.625,3.475 v1(28.8,3.3) 29.325,3.3 29.55,3.075 U2.9 ; U2.1 36.075,3.575 36.325,3.825 v1(36.325,4.076)
V_del: C10.2 R1.1 R2.2 R9.1
  other v1: 19,11.75 17.75,12
V_ref: C27.2 U2.7 U6.1 | length 8.1
  Top Layer w0.254: C27.2 v1(28.875,0.65)
  Bottom Layer w0.254: U6.1 25.825,1.525 26.7,0.65 28.067,0.65 28.631,0.65 28.781,0.5 28.875,0.594 v1(28.875,0.65) 28.909,0.684 29.159,0.684 29.75,1.275 29.75,1.829 29.996,2.075 U2.7
pads on no net: U3.1 U3.6 U4.1 U4.6 X1.7

## Polygon pours and split planes (outlines as drawn)
no net on Mechanical 1 "NONET_L-01_P-001" (solid): 2.5,10.5 20.2,10.5 20.2,0.5 2.5,0.5
no net on Mechanical 1 "NONET_L-01_P-001" (solid): 24.2,16 36.5,16 36.5,0.5 24.2,0.5
GND on Top Layer "GND_L01_P024" (solid, pour order 24): 0,16 0,0 16.5,0 16.5,-6 40,-6 40,16
-5V on Top Layer "-5V_L01_P020" (solid, pour order 20): 25.9,0.661 25.9,-4.1 22.45,-4.1 22.45,0.638
5V on Top Layer "5V_L01_P019" (solid, pour order 19): 19.425,-4.525 19.425,-1.675 24.05,-1.675 24.05,-4.525
5V on Top Layer "5V_L01_P018" (solid, pour order 18): 30.967,10.7 36,10.7 36,8.325 34.425,8.325 34.425,8.9 30.967,8.9
5V on Top Layer "5V_L01_P012" (solid, pour order 12): 23.717,10.7 28.967,10.7 28.967,8.3 26.95,8.3 26.95,8.9 23.717,8.9
-5V on Top Layer "-5V_L01_P011" (solid, pour order 11): 21.425,7.375 18.4,7.375 18.4,8.45 19.85,8.45 19.85,9.425 21.425,9.425
-5V on Top Layer "-5V_L01_P005" (solid, pour order 5): 31,4.5 36,4.5 36,7.2 31,7.2
-5V on Top Layer "-5V_L01_P004" (solid, pour order 4): 23.75,4.5 28.75,4.5 28.75,7.175 23.75,7.175
5V on Top Layer "5V_L01_P003" (solid, pour order 3): 15,5.15 20.25,5.15 20.25,7.9 15,7.9
V_del on Top Layer "V_DEL_L01_P002" (solid, pour order 2): 19.75,10.5 17,10.5 17,12.5 19.75,12.5
GND on Bottom Layer "GND_L04_P021" (solid, pour order 21): 0,16 0,0 16.5,0 16.5,-6 40,-6 40,16
5V on Bottom Layer "5V_L04_P017" (solid, pour order 17): 32.35,13.825 32.35,11.4 31.675,11.4 31.675,9.825 30.763,9.825 30.736,5.975 33.125,5.975 33.125,8.691 35.2,8.691 35.2,11.525 33.6,11.525 33.6,13.825
SDA on Bottom Layer "SDA_L04_P014" (solid, pour order 14): 26.266,2.85 32.2,2.85 32.2,3.7 26.266,3.7
V_del on Bottom Layer "V_DEL_L04_P000" (solid, pour order 0): 19.75,9 17,9 17,12.5 19.75,12.5
-5V on Power "-5V_L03_P007" (solid, pour order 7): 19.75,8.75 19.75,13 22.077,13.004 22.107,8.75 36.1,8.75 36.1,4.6 26,4.6 26,-4.1 24.9,-4.1 24.9,-2.512 21.5,-2.512 21.5,5.25 19.75,5.25
5V on Power "5V_L03_P023" (solid, pour order 23): 0,16 0,0 16.5,0 16.5,-6 40,-6 40,16
GND on GND "GND_L02_P022" (solid, pour order 22): 0,16 0,0 16.5,0 16.5,-6 40,-6 40,16

## Other copper
Top Layer:
  pour cut-out: 0,16 4.2,16 4.2,9.25 0,9.25
  text "1" at 1.25,15 h1.5 r270
GND:
  pour cut-out: 0,16 4.2,16 4.2,9.25 0,9.25
  text "2" at 1.25,13.75 h1.5 r270
Power:
  pour cut-out: 0,16 4.2,16 4.2,9.25 0,9.25
  text "3" at 1.25,12.25 h1.5 r270
Bottom Layer:
  pour cut-out: 0,16 4.2,16 4.2,9.25 0,9.25
  text "4" at 1.25,10.75 h1.5 r270

## Silkscreen, mask and mechanical layers (free items; w line width, h text height)
Mechanical 1:
  circle w0.01: c5.5,13.5 r2
  circle w0.01: c19.5,13.5 r2
  circle w0.01: c37.5,-3.5 r2
  lines w0.01: 0,8.8 40,8.8 ; 0,13.5 40,13.5 ; 5.5,0 5.5,16 ; 13,0 13,16 ; 16.5,-3.5 40,-3.5 ; 19.5,-6 19.5,16 ; 37.5,-6 37.5,16
  lines w0.2: 2.5,0.5 20.2,0.5 20.2,10.5 2.5,10.5 2.5,0.5 ; 24.2,0.5 36.5,0.5 36.5,16 24.2,16 24.2,0.5